# Altium PCB Rev(5).PCBDOC (part 2 of 3)
Units mm, origin at the board's own origin, x right, y up, seen from the top; angles counter-clockwise.
Board outline 161.79 x 99.5 mm, 4 copper layers (Top Layer, InternalPlane1, InternalPlane2, Bottom Layer); 374 components, 275 nets, 1404 pads, 444 vias.
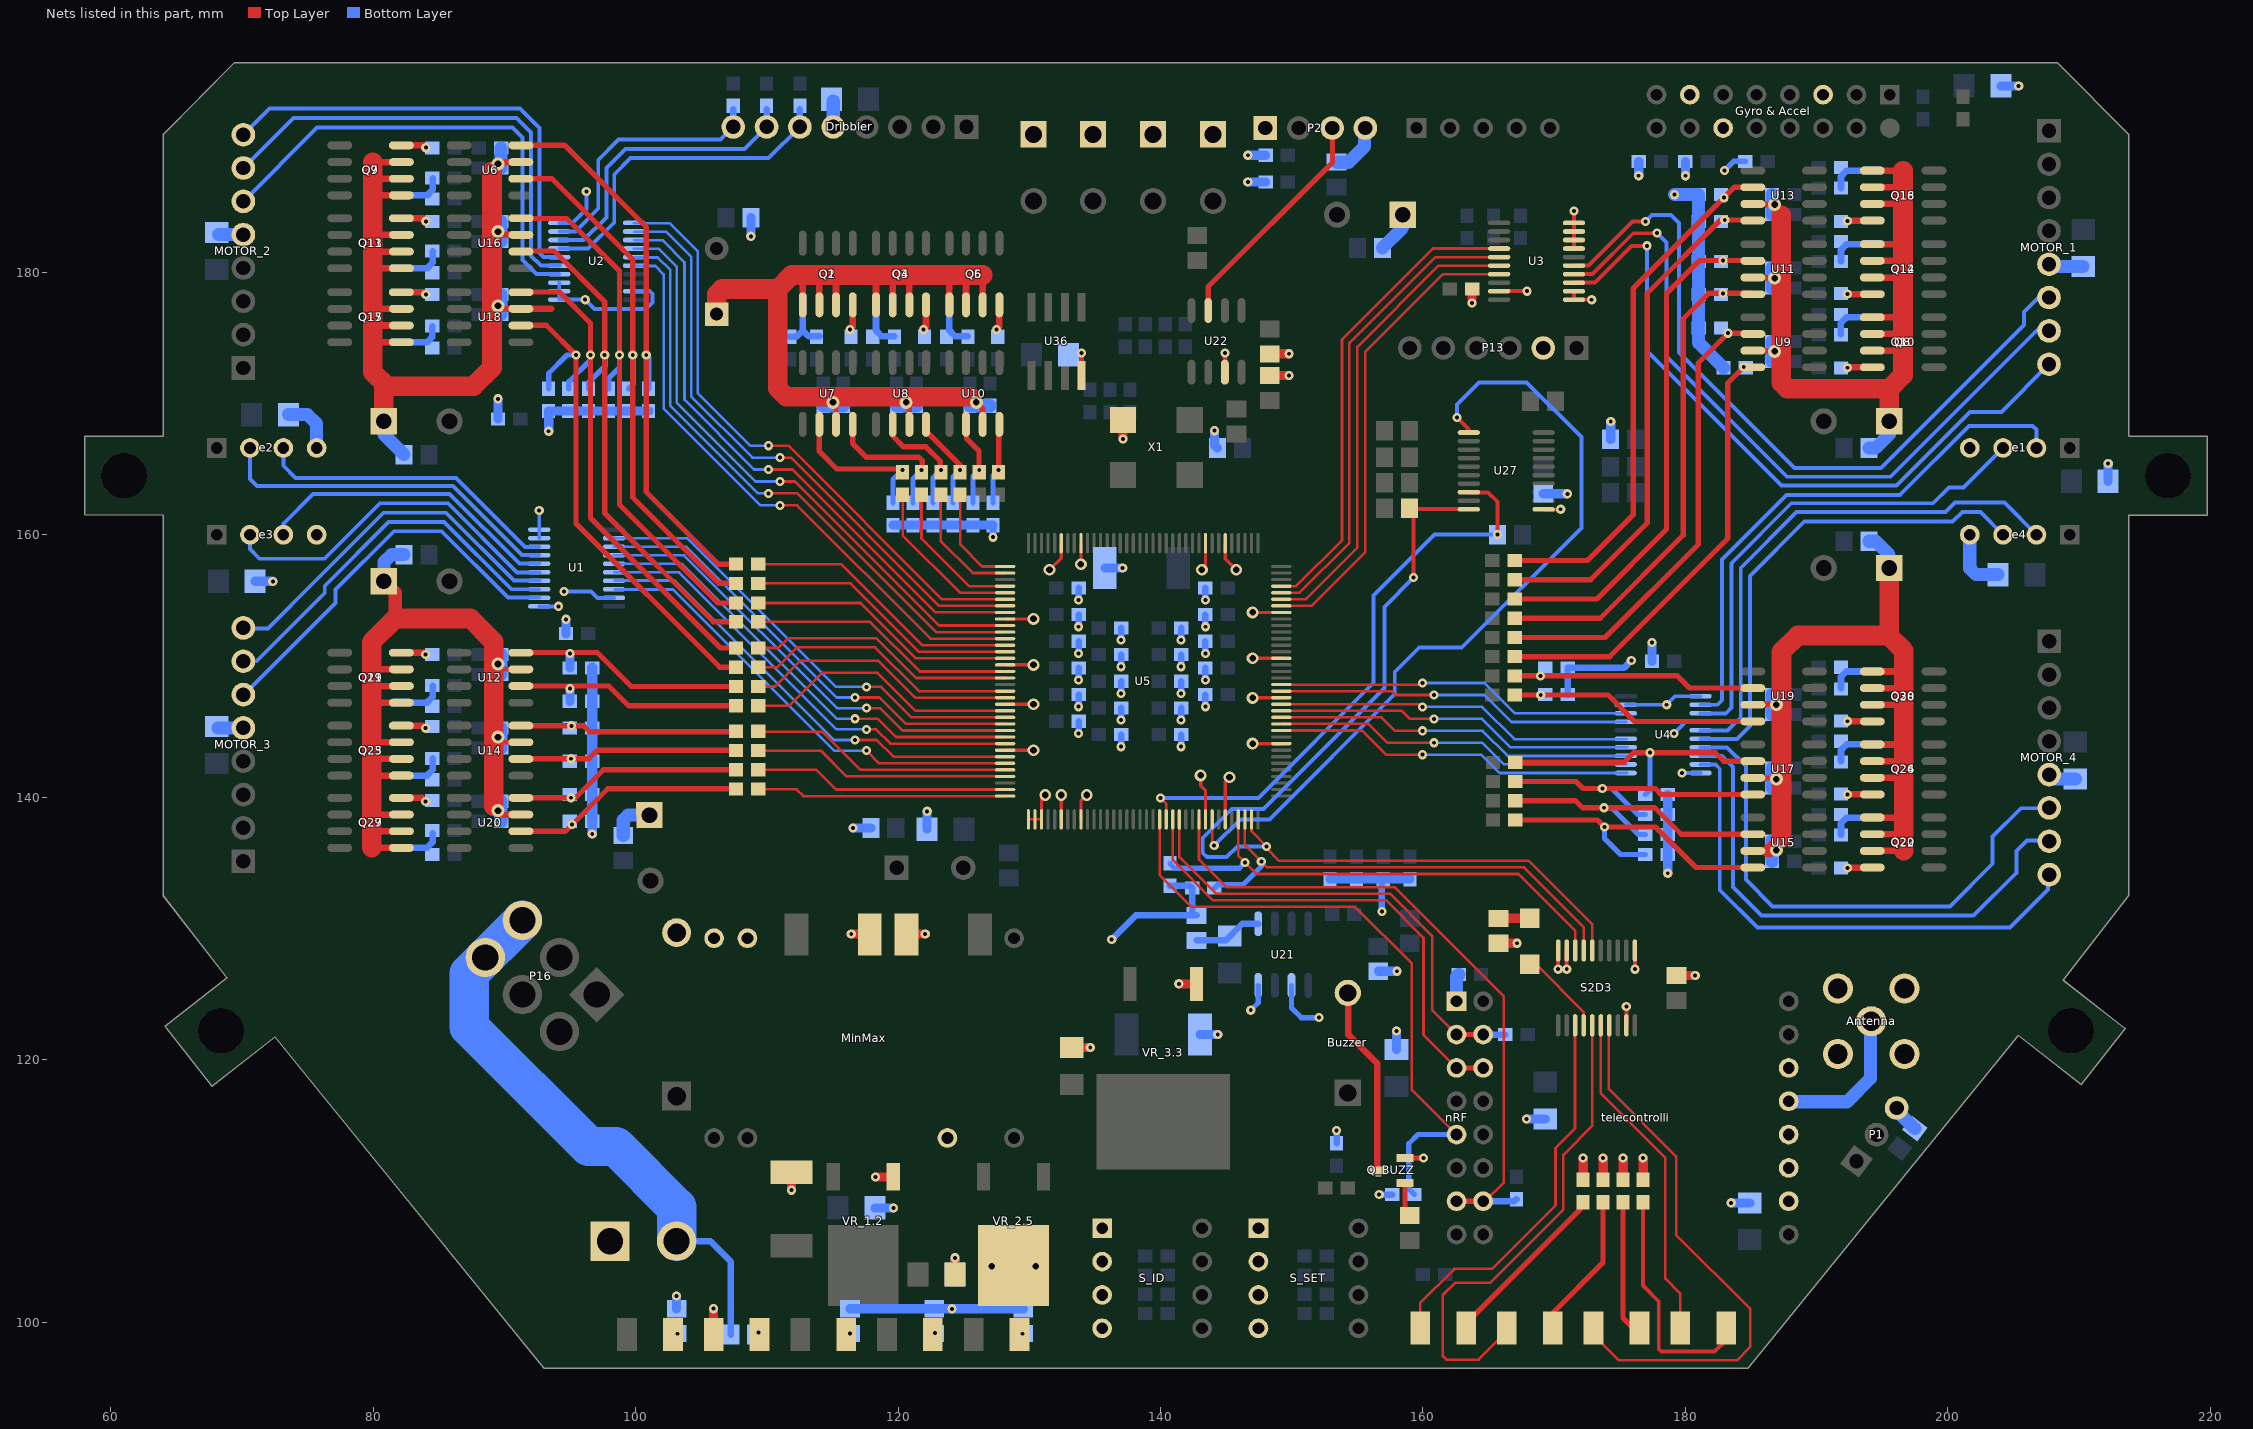
[diagram p4: the nets of this part, all layers, seen from the top]

## Via types
v1: diameter 0.7, hole 0.3, Top Layer to Bottom Layer, 308 vias
v2: diameter 1, hole 0.5, Top Layer to Bottom Layer, 66 vias
v3: diameter 0.9, hole 0.5, Top Layer to Bottom Layer, 38 vias
v4: diameter 0.99, hole 0.5, Top Layer to Bottom Layer, 30 vias
v5: diameter 0.6, hole 0.3, Top Layer to Bottom Layer, 2 vias

## Nets (pads, with @x,y where several pads share a name; then routed paths per layer and width w, separated by ;. In a path a pad name is that pad's centre, name@x,y a point inside that pad or via, vN(x,y) a via of type N, cw(c..) or ccw(c..) an arc to the next point about the centre after c; other vN are vias at no path point) (continued)
D_IO12: nRF.5 R157.1 U5.57 | length 48.7
  Top Layer w0.2: U5.57@139.934,138.319 139.934,134.096 142.37,131.66 154.82,131.66 159.16,127.32 159.16,117.7 nRF.5@162.56,114.3
  Bottom Layer w0.4: R157.1@159.346,109.728 158.92,110.154 158.92,113.6 159.62,114.3 nRF.5@162.56,114.3
D_IO13: nRF.3 telecontrolli.14 U5.59 | length 37.7
  Top Layer w0.2: U5.59@140.934,138.319 140.934,135.206 143.98,132.16 157.17,132.16 160.04,129.29 160.04,121.9 nRF.3@162.56,119.38
  Top Layer w0.4: nRF.3@162.56,119.38 telecontrolli.14@164.592,119.38
D_IO14: nRF.2 R127.2 telecontrolli.15 U5.60 | length 36.6
  Top Layer w0.2: U5.60@141.434,138.319 141.434,135.446 144.22,132.66 157.49,132.66 160.7,129.45 160.7,123.78 nRF.2@162.56,121.92
  Top Layer w0.4: nRF.2@162.56,121.92 telecontrolli.15@164.592,121.92
  Bottom Layer w0.5: telecontrolli.15@164.592,121.92 R127.2@166.282,121.92
D_IO15: nRF.7 R128.2 telecontrolli.10 U5.63 | length 51.6
  Top Layer w0.2: U5.63@142.934,138.319 142.934,135.256 145.03,133.16 157.85,133.16 166.17,124.84 166.17,110.66 164.661,109.151 telecontrolli.10@164.63,109.12
  Top Layer w0.4: nRF.7@162.56,109.22 telecontrolli.10@164.592,109.22
  Bottom Layer w0.5: telecontrolli.10@164.592,109.22 166.966,109.22 R128.2@167.132,109.386
D_IO17: R126.1 S2D3.8 U5.69 | length 38.4
  Top Layer w0.2: U5.69@145.934,138.319 145.934,135.536 v1(146.437,135.033) 147.31,134.16 167.28,134.16 171.61,129.83 171.61,128.35 171.619,128.341 S2D3.8@171.64,128.32
  Bottom Layer w0.4: R126.1@140.716,134.962 141.078,134.6 146.003,134.6 v1(146.437,135.033)
D_IO18: R125.1 S2D3.7 U5.70 | length 36.8
  Top Layer w0.2: U5.70@146.434,138.319 146.434,136.356 v1(147.683,135.107) 148.13,134.66 167.7,134.66 172.25,130.11 S2D3.7@172.25,128.34
  Bottom Layer w0.4: R125.1@144.106,133.096 144.35,133.34 146.29,133.34 147.683,134.733 v1(147.683,135.107)
DEBUG_D_1: D_D_1.1 S2D3.13 | length 30.2
  Top Layer w0.2: D_D_1.1@159.794,99.06 159.794,101.474 162.39,104.07 165.26,104.07 170.1,108.91 170.1,113.27 171.59,114.76 S2D3.13@171.59,122.69
DEBUG_D_2: D_D_2.1 S2D3.15 | length 37.1
  Top Layer w0.2: D_D_2.1@166.18,99.09 164.23,97.14 161.8,97.14 161.51,97.43 161.51,102.06 162.45,103 165.12,103 170.7,108.58 170.7,112.76 172.9,114.96 S2D3.15@172.9,122.626
DEBUG_D_3: D_D_3.1 S2D3.17 | length 42.2
  Top Layer w0.2: D_D_3.1@173.01,99.04 174.95,97.1 183.92,97.1 184.95,98.13 184.95,101.01 179.3,106.66 179.3,112.635 174.17,117.765 S2D3.17@174.17,122.67
DEBUG_D_4: D_D_4.1 S2D3.16 | length 25.6
  Top Layer w0.2: S2D3.16@173.54,122.59 173.54,117.455 178.48,112.515 178.48,103.32 179.606,102.194 D_D_4.1@179.606,99.56 ; D_D_4.1@179.55,99.05 D_D_4.1@179.55,99.072
DIN: U5.65 U27.1 | length 62.4
  Top Layer w0.2: U5.65@143.934,138.319 143.934,136.496 v1(144.09,136.34)
  Top Layer w0.3: v1@162.61,168.94 163.47,168.08 U27.1@163.47,167.79
  Bottom Layer w0.3: v1@144.09,136.32 146.09,138.32 148.3,138.32 157.85,147.87 157.85,149.56 159.72,151.43 162.96,151.43 172.07,160.54 172.07,167.45 167.9,171.62 164.28,171.62 162.59,169.93 v1@162.59,168.92
  other v1: 162.59,168.94
DONE: R34.2 S2D3.6 U5.71 U27.10 | length 76.1
  Top Layer w0.2: U5.71@146.934,138.319 146.934,137.416 v1(148.09,136.26) ; v1@148.075,136.245 v1@148.08,136.24 ; v1@148.1,136.26 148.1,136.1 149.04,135.16 168.07,135.16 172.9,130.33 S2D3.6@172.9,128.32
  Top Layer w0.3: v1@159.29,156.74 159.29,161.632 158.962,161.96 U27.10@163.46,161.96
  Bottom Layer w0.3: v1(148.09,136.26) 145.86,136.26 145.04,135.44 143.55,135.44 143.22,135.77 143.22,136.9 145.43,139.11 147.85,139.11 157.07,148.33 157.07,154.52 v1@159.29,156.74
  other v1: 159.27,156.76
DONE_LED: D_Done.1 S2D3.14 | length 7.1
  Top Layer w0.2: D_Done.1@167.64,127.282 168.598,127.282 172.253,123.627 S2D3.14@172.253,122.626
"ENCODER 1-0": U4.17 U5.89 | length 27.3
  Top Layer w0.2: U5.89@149.209,148.094 157.61,148.094 157.904,147.8 v1(160.85,147.8)
  Bottom Layer w0.2: v1(160.85,147.8) 164.69,147.8 166.75,145.74 U4.17@175.5,145.74
"ENCODER 1-1": U4.18 U5.90 | length 27.3
  Top Layer w0.2: U5.90@149.209,148.594 159.854,148.594 v1(159.97,148.71)
  Bottom Layer w0.2: v1(159.97,148.71) 164.7,148.71 167.01,146.4 U4.18@175.47,146.4
"ENCODER 2-0": U1.12 U5.24 | length 35.5
  Top Layer w0.2: v1(117.6,148.42) 118.71,148.42 121.036,146.094 U5.24@128.159,146.094
  Bottom Layer w0.2: U1.12@98.36,159.8 98.379,159.78 98.41,159.75 103.93,159.75 115.26,148.42 v1(117.6,148.42)
"ENCODER 2-1": U1.13 U5.25 | length 35.4
  Top Layer w0.2: v1(116.72,147.61) 118.58,147.61 120.596,145.594 U5.25@128.159,145.594
  Bottom Layer w0.2: U1.13@98.34,159.11 103.82,159.11 115.32,147.61 v1(116.72,147.61)
"ENCODER 3-0": U1.14 U5.26 | length 35.3
  Top Layer w0.2: v1(117.6,146.8) 118.64,146.8 120.346,145.094 U5.26@128.159,145.094
  Bottom Layer w0.2: U1.14@98.34,158.44 103.7,158.44 115.34,146.8 v1(117.6,146.8)
"ENCODER 3-1": U1.15 U5.27 | length 35.3
  Top Layer w0.2: v1(116.72,145.99) 118.45,145.99 119.846,144.594 U5.27@128.159,144.594
  Bottom Layer w0.2: U1.15@98.34,157.79 103.52,157.79 115.32,145.99 v1(116.72,145.99)
"ENCODER 4-0": U4.14 U5.86 | length 27.5
  Top Layer w0.2: U5.86@149.209,146.594 158.396,146.594 159.01,145.98 v1(160.85,145.98)
  Bottom Layer w0.2: v1(160.85,145.98) 164.52,145.98 166.69,143.81 U4.14@175.55,143.81
"ENCODER 4-1": U4.15 U5.87 | length 27.4
  Top Layer w0.2: U5.87@149.209,147.094 159.766,147.094 v1(159.97,146.89)
  Bottom Layer w0.2: v1(159.97,146.89) 164.52,146.89 166.97,144.44 U4.15@175.52,144.44
GND: "Gyro & Accel.5" "Gyro & Accel.12" "Gyro & Accel.13" Antenna.1 Antenna.2 Antenna.4 Antenna.5 Battery.1 C1.2 C2(tele).2 C2.2 C3.2 C4.1 C5.2 C6.2 C7.2 C8.2 C9.2 C10.2 C11.1 C12.1 C13.1 C14.1 C15.1 C16.1 C17.1 C18.1 C19.1 C20.2 C21.2 C22.1 C23.1 C24.1 C25.1 C26.1 C27.1 C28.1 C29.1 C30.1 C31.1 C32.1 C33.1 C34.1 C35.1 C36.1 C37.1 C38.1 C39.1 C40.1 C41.1 C42.1 C43.1 C44.1 C45.1 C46.1 C47.1 C48.1 C49.1 C50.1 C51.1 C52.1 C53.1 C54.1 C55.1 C56.1 C57.1 C58.1 C59.1 C60.1 C61.1 C62.1 C63.2 C64.1 C65.2 C66.2 C67.2 C68.2 C69.2 C70.2 C71.2 C72.2 C73.1 C74.1 C75.1 C76.1 C77.1 C78.1 C79.1 C80.2 C81.2 C110.2 C120.2 C130.2 C(tele).2 C_1.2 C_16.2 C_17.2 C_19.2 C_ADC.1 C_DRIBBLER.1 C_IR.2 C_M1.1 C_M2.1 C_M3.1 C_M4.1 C_MIKONA.1 CnRF.1 D_correction.1 D_REV.1 Dribbler.5 e1.4 e2.4 e3.4 e4.4 MinMax.4 MinMax.6 MinMax.17 MOTOR_1.5 MOTOR_2.5 MOTOR_3.5 MOTOR_4.5 nRF.1 P1.3 P2.1 P13.2 Q2.1 Q2.2 Q2.3 Q4.1 Q4.2 Q4.3 Q6.1 Q6.2 Q6.3 Q9.1 Q9.2 Q9.3 Q10.1 Q10.2 Q10.3 Q13.1 Q13.2 Q13.3 Q14.1 Q14.2 Q14.3 Q17.1 Q17.2 Q17.3 Q18.1 Q18.2 Q18.3 Q21.1 Q21.2 Q21.3 Q22.1 Q22.2 Q22.3 Q25.1 Q25.2 Q25.3 Q26.1 Q26.2 Q26.3 Q29.1 Q29.2 Q29.3 Q30.1 Q30.2 Q30.3 Q_BUZZ.2 R1.2 R2.5.1 R3.1 R21.1 R22.2 R24.1 R45.1 R53.2 R54.2 R56.2 R57.2 R58.2 R63.2 R64.2 R69.2 R70.2 R75.2 R76.2 R81.2 R82.2 R87.2 R88.2 R93.1 R94.2 R95.2 R96.2 R97.2 R98.2 R99.2 R100.2 R101.2 R102.2 R103.2 R104.2 R105.2 R106.2 R107.2 R108.2 R114.2 R120.2 R121.2 R122.1 R123.2 R124.2 R125.2 R126.2 R134.2 R154.2 R155.2 R156.2 R157.2 R159.2 R160.1 R174.2 R346.1 R_done_led.2 RST_CAP_1.1 S2D3.1 S2D3.9 S2D3.10 S2D3.19 S_D_1.1 S_D_2.1 S_D_3.1 S_D_4.1 S_ID.1 S_ID.2 S_ID.3 S_ID.4 S_SET.1 S_SET.2 S_SET.3 S_SET.4 telecontrolli.2 telecontrolli.3 telecontrolli.4 telecontrolli.6 U1.1 U1.9 U1.10 U1.19 U2.1 U2.2 U2.3 U2.10 U2.19 U3.1 U3.2 U3.7 U3.8 U3.9 U3.10 U3.19 U4.1 U4.4 U4.10 U4.19 U5.9 U5.16 U5.22 U5.29 U5.37 U5.38 U5.39 U5.42 U5.45 U5.64 U5.67 U5.81 U5.88 U5.94 U5.101 U5.114 U5.117 U5.136 U5.139 U6.3 U7.3 U8.3 U9.3 U10.3 U11.3 U12.3 U13.3 U14.3 U15.3 U16.3 U17.3 U18.3 U19.3 U20.3 U21.2 U21.4 U22.3 U27.11 U36.4 VR_1.2.1 VR_2.5.4 VR_3.3.1 X1.2 | length 687.6
  Top Layer w0.2: 80.812,171.112 81.04,171.34 ; U5.37@129.934,138.319 U5.39@130.929,138.319
  Top Layer w0.25: U5.29@128.159,143.594 v3(130.32,143.594) ; U5.22@128.159,147.094 v3(130.32,147.094) ; U5.16@128.159,150.094 v3(130.32,150.094) ; U5.9@128.159,153.594 v3(130.32,153.594) ; U5.39@130.93,138.32 v3@130.93,140.18 ; v3(131.54,157.34) 132.434,158.234 U5.139@132.434,159.369 ; U5.42@132.434,138.319 v3(132.434,140.18) ; U5.45@133.934,138.319 133.934,139.734 v3(134.38,140.18) ; v3(133.934,157.76) U5.136@133.934,159.369 ; v3(143.06,141.67) 143.06,140.87 143.434,140.496 U5.64@143.434,138.319 ; v3(143.16,157.34) 143.434,157.614 U5.117@143.434,159.369 ; U5.67@144.934,138.319 144.934,141.204 v3(145.26,141.53) ; U5.114@144.934,159.369 144.934,158.186 v3(145.78,157.34) ; v3(147.02,144.094) U5.81@149.209,144.094 ; v3@147.02,147.594 U5.88@149.209,147.594 ; v3@147.02,150.594 U5.94@149.209,150.594 ; v3(147.02,154.094) U5.101@149.209,154.094
  Top Layer w0.3: U3.19@165.806,178.573 v1(167.919,178.573) ; U27.11@169.198,161.951 v1@170.494,161.951 ; v1@170.303,126.91 S2D3.10@170.303,128.326 ; v1@170.953,126.91 S2D3.9@170.953,128.326 ; U3.2@171.506,178.573 U3.1@171.506,177.923 v1@172.856,177.923 ; U3.7@171.506,181.823 v1(171.506,184.689) ; S2D3.19@175.503,122.626 v1@175.503,124.042 ; v1@176.153,126.91 S2D3.1@176.153,128.326
  Top Layer w0.35: v4@89.331,149.751 U12.3@91.256,149.751 ; v4@89.335,144.195 U14.3@91.256,144.195 ; U19.3@185.32,147.08 U19.3@185.33,147.09
  Top Layer w0.4: U7.3@115.263,168.384 v4@115.263,170.098 ; U8.3@120.86,168.38 v4@120.86,170.12 ; v4(125.972,170.098) 126.45,169.62 U10.3@126.45,168.38 ; U36.4@133.985,172.152 v1@133.985,173.858 ; U22.3@144.907,172.402 v1@144.907,173.86 ; Q_BUZZ.2@158.627,112.513 v1@160.043,112.513 ; U9.3@185.08,174.01 v4@186.7,174.01 ; U11.3@185.08,179.6 v4@186.97,179.6 ; U13.3@185.084,185.197 186.483,185.197 187.31,184.37 ; U17.3@185.32,141.48 v4@186.89,141.48 ; U15.3@185.33,135.91 186.35,135.91 ; U19.3@185.33,147.09 v4@186.47,147.09
  Top Layer w0.5: 79.88,136.145 Q29.1@82.15,136.145 ; 79.88,137.415 Q29.2@82.15,137.415 ; 79.88,138.685 Q29.3@82.15,138.685 ; 79.88,141.655 Q25.1@82.15,141.655 ; 79.88,142.925 Q25.2@82.15,142.925 ; 79.88,144.195 Q25.3@82.15,144.195 ; 79.88,147.211 Q21.1@82.15,147.211 ; 79.88,148.481 Q21.2@82.15,148.481 ; 79.88,149.751 Q21.3@82.15,149.751 ; 79.96,174.685 Q17.1@82.15,174.685 ; 79.96,175.957 Q17.2@82.15,175.955 ; 79.96,177.227 Q17.3@82.15,177.225 ; 79.96,180.321 Q13.1@82.15,180.321 ; 79.96,181.593 Q13.2@82.15,181.591 ; 79.96,182.863 Q13.3@82.15,182.861 ; 79.96,185.871 Q9.1@82.15,185.873 ; 79.96,187.143 Q9.2@82.15,187.143 ; 79.96,188.413 Q9.3@82.15,188.413 ; 89.06,187.7 89.773,188.413 U6.3@91.256,188.413 ; v4@89.19,139.31 89.815,138.685 U20.3@91.256,138.685 ; v4@89.411,182.861 U16.3@91.256,182.861 ; v4@89.425,177.225 93.571,177.225 ; Q2.1@112.731,177.531 112.731,179.8 ; Q2.2@114.001,177.531 114.001,179.8 ; Q2.3@115.271,177.531 115.271,179.8 ; Q4.1@118.319,177.531 118.319,179.8 ; Q4.2@119.589,177.531 119.589,179.8 ; Q4.3@120.859,177.531 120.859,179.8 ; Q6.1@123.907,177.531 123.907,179.8 ; Q6.2@125.177,177.531 125.177,179.8 ; Q6.3@126.447,177.531 126.447,179.8 ; Q22.3@194.246,135.917 196.65,135.917 ; Q22.2@194.246,137.187 196.65,137.187 ; Q22.1@194.246,138.457 196.65,138.457 ; Q26.3@194.246,141.487 196.65,141.487 ; Q26.2@194.246,142.757 196.65,142.757 ; Q26.1@194.246,144.027 196.65,144.027 ; Q30.3@194.246,147.051 196.65,147.051 ; Q30.2@194.246,148.321 196.65,148.321 ; Q30.1@194.246,149.591 196.65,149.591 ; Q10.3@194.246,174.043 196.58,174.043 ; Q10.2@194.246,175.313 196.58,175.313 ; Q10.1@194.246,176.583 196.58,176.583 ; Q14.3@194.246,179.613 196.58,179.613 ; Q14.2@194.246,180.883 196.58,180.883 ; Q14.1@194.246,182.153 196.58,182.153 ; Q18.3@194.246,185.221 196.58,185.221 ; Q18.2@194.246,186.491 196.58,186.491 ; Q18.1@194.246,187.761 196.58,187.761
  Top Layer w0.7: D_REV.1@105.94,99.35 v1(105.94,101.03) ; v1@111.89,110.064 C_19.2@111.89,111.414 ; v1(116.434,129.58) C_16.2@117.856,129.58 ; v1@118.283,111.071 VR_1.2.1@119.633,111.071 ; C_17.2@120.644,129.58 v1(122.066,129.58) ; C31.1@124.336,103.632 v1@124.336,104.906 ; C8.2@133.222,120.93 v1(134.644,120.93) ; v1@137.14,167.306 X1.2@137.14,168.764 ; v1@141.398,125.784 VR_3.3.1@142.748,125.784 ; R22.2@148.336,172.146 v1@149.794,172.146 ; C_IR.2@148.336,173.802 v1@149.794,173.802 ; v1@163.748,177.67 C76.1@163.748,178.734 ; R_done_led.2@165.758,128.878 v1(167.18,128.878) ; R114.2@172.212,111.086 v1@172.212,112.502 ; R134.2@173.736,111.086 v1@173.736,112.502 ; R154.2@175.26,111.086 v1@175.26,112.502 ; R174.2@176.784,111.086 v1@176.784,112.502 ; C63.2@179.324,126.426 v1(180.746,126.426)
  Top Layer w1: C_M3.1@80.812,156.464 81.68,155.596 81.68,153.63 ; VR_2.5.4@128.786,104.303 VR_2.5.4@128.81,104.28 ; 186.35,135.91 187.33,136.89
  Top Layer w1.5: 79.88,136.151 79.88,151.83 81.68,153.63 87.41,153.63 89.19,151.85 v4@89.19,139.31 ; 79.96,188.401 79.96,172.42 81.04,171.34 87.66,171.34 89.06,172.74 89.06,187.7 ; C_M2.1@80.812,168.656 80.812,171.504 ; C_DRIBBLER.1@106.172,176.824 106.172,178.332 106.58,178.74 110.84,178.74 ; 125.53,170.54 111.47,170.54 110.84,171.17 110.84,178.74 ; 126.451,179.8 111.9,179.8 110.84,178.74 ; 187.31,184.37 187.31,171.61 187.78,171.14 195.55,171.14 196.58,172.17 196.58,187.761 ; 187.33,136.89 187.33,151.1 188.57,152.34 195.48,152.34 196.65,151.17 196.65,135.921 ; 195.54,152.4 C_M4.1@195.54,157.48 ; C_M1.1@195.54,168.656 195.54,171.13
  Bottom Layer w0.3: U1.1@92.654,154.555 v1@94.112,154.555 ; U1.9@92.654,159.755 v1@92.654,161.863 ; U2.3@94.178,179.223 U2.1@94.178,177.923 v1(96.157,177.923) 96.87,177.21 100.81,177.21 101.3,177.7 101.3,178.35 101.077,178.573 U2.19@99.878,178.573 ; U2.10@94.178,183.773 95.173,183.773 96.24,184.84 v1(96.24,186.18) ; v1(94.55,155.69) 96.61,155.69 97.095,155.205 U1.19@98.354,155.205 ; U4.19@175.458,147.055 v1(178.575,147.055) 179.225,147.705 U4.1@181.158,147.705 ; v1(179.13,144.86) 180.025,145.755 U4.4@181.158,145.755 ; v1@179.742,141.855 U4.10@181.158,141.855
  Bottom Layer w0.4: v1(146.88,123.778) 147.447,124.345 U21.4@147.447,125.666 ; U21.2@149.987,125.666 149.987,123.953 150.73,123.21 v1(152.08,123.21) ; v1(182.97,187.77) 183.668,188.468 R155.2@184.57,188.468
  Bottom Layer w0.5: v1(127.236,159.826) R108.2@127.236,160.748 ; v1(133.756,144.874) C23.1@133.756,145.796 ; v1(133.756,146.906) C78.1@133.756,147.828 ; v1(133.756,148.938) C17.1@133.756,149.86 ; v1(133.756,150.97) C77.1@133.756,151.892 ; v1(133.756,153.002) C18.1@133.756,153.924 ; v1(133.756,155.034) C25.1@133.756,155.956 ; v1(136.28,129.17) 138.108,130.998 C_ADC.1@142.748,130.998 ; v1(136.994,143.858) C35.1@136.994,144.78 ; v1(136.994,145.89) C34.1@136.994,146.812 ; v1(136.994,147.922) C75.1@136.994,148.844 ; v1(136.994,149.954) C36.1@136.994,150.876 ; v1(136.994,151.986) C33.1@136.994,152.908 ; R126.2@140.716,133.262 142.24,133.262 R125.2@142.406,133.096 C_ADC.1@142.406,131.34 ; v1(141.566,143.858) C74.1@141.566,144.78 ; v1(141.566,145.89) C12.1@141.566,146.812 ; v1(141.566,147.922) C73.1@141.566,148.844 ; v1(141.566,149.954) C11.1@141.566,150.876 ; v1(141.566,151.986) C13.1@141.566,152.908 ; v1(143.422,146.906) C15.1@143.422,147.828 ; v1(143.422,148.938) C16.1@143.422,149.86 ; v1(143.422,150.97) C79.1@143.422,151.892 ; v1(143.422,153.002) C14.1@143.422,153.924 ; v1(143.422,155.034) C24.1@143.422,155.956 ; R156.2@153.416,113.626 v1(153.416,114.608) ; v1(156.664,109.728) R157.2@157.646,109.728 ; v1(156.87,131.29) R120.2@156.87,133.77 ; R70.2@171.03,147.828 R57.2@171.03,149.86 175.32,149.86 v1(175.88,150.42)
  Bottom Layer w0.7: C120.2@70.996,156.464 v1@72.346,156.464 ; C37.1@89.51,168.824 v1(89.51,170.37) ; v1(93.374,167.898) R54.2@93.374,169.444 R105.2@100.994,169.444 ; C39.1@94.694,152.472 v1@94.694,153.562 ; v1(96.696,137.214) R101.2@96.696,138.176 ; R1.2@103.124,101.026 v1(103.124,101.988) ; v1@108.784,182.76 C69.2@108.784,184.178 ; R24.1@116.332,101.026 R3.1@129.54,101.026 ; v1@116.572,137.668 R122.1@117.922,137.668 ; C62.1@118.24,108.712 v1@119.658,108.712 ; R58.2@119.616,160.748 R108.2@127.236,160.748 ; RST_CAP_1.1@122.216,137.58 v1@122.216,138.93 ; R2.5.1@124.336,103.552 v1@124.336,104.902 ; C80.2@135.764,157.48 v1@137.114,157.48 ; C_1.2@143.008,121.92 v1@144.358,121.92 ; v1(144.12,167.94) 144.12,166.842 C21.2@144.338,166.624 ; v1@146.658,186.898 C64.1@148.008,186.898 ; v1@146.658,188.93 R93.1@148.008,188.93 ; R124.2@152.908,133.77 R121.2@159.004,133.77 ; R45.1@156.604,126.746 v1(158.026,126.746) ; C7.2@157.988,120.78 v1(157.988,122.202) ; v1(167.894,115.496) 169.316,115.496 ; C72.2@169.164,163.134 v1@170.998,163.134 ; R346.1@174.31,167.278 v1@174.31,168.628 ; v1(176.442,187.37) R160.1@176.442,188.468 ; C38.1@177.458,150.368 v1@177.458,151.786 ; v1@178.65,134.22 R87.2@178.65,140.217 ; v1(179.998,187.37) R159.2@179.998,188.468 ; v1@183.494,109.096 184.912,109.096 ; C10.2@204.048,194.218 v1@205.398,194.218 ; C3.2@212.22,164.084 v1@212.22,165.434
  Bottom Layer w0.8: R101.2@96.696,138.176 R96.2@96.696,149.86
  Bottom Layer w1: C110.2@68.176,145.288 MOTOR_3.5@70.104,145.288 ; C130.2@68.226,182.88 MOTOR_2.5@70.104,182.88 ; C9.2@73.536,169.164 74.996,169.164 75.692,168.468 e2.4@75.692,166.624 ; C_M3.1@80.812,156.464 80.812,157.912 81.396,158.496 C81.2@82.362,158.496 ; C_M2.1@80.812,168.656 80.812,167.666 C70.2@82.362,166.116 ; C58.1@89.75,138.176 C59.1@89.75,139.7 ; C55.1@89.75,143.764 C54.1@89.75,145.288 ; C50.1@89.75,149.352 C51.1@89.75,150.876 ; C46.1@89.75,176.784 C47.1@89.75,178.308 ; C42.1@89.75,182.372 C43.1@89.75,183.896 ; C32.1@89.75,187.96 C30.1@89.75,189.484 ; C66.2@99.06,137.094 99.06,138.27 99.434,138.644 C4.1@101.048,138.644 ; C4.1@100.82,138.67 C4.1@100.82,138.72 ; C22.1@114.3,169.838 C19.1@115.824,169.838 ; Dribbler.5@115.058,191.088 C6.2@115.058,193.074 ; C26.1@119.888,169.838 C27.1@121.412,169.838 ; C28.1@125.476,169.838 C29.1@127,169.838 ; C71.2@156.906,181.864 158.456,183.414 C_MIKONA.1@158.456,184.404 ; nRF.1@162.56,124.46 162.56,126.326 CnRF.1@162.726,126.492 ; v1(179.168,185.928) R53.2@181.014,185.928 181.014,174.632 R104.2@182.906,172.74 ; C52.1@186.602,135.128 C53.1@186.602,136.652 ; C56.1@186.602,140.716 C57.1@186.602,142.24 ; C61.1@186.602,146.304 C60.1@186.602,147.828 ; C40.1@186.602,173.228 C41.1@186.602,174.752 ; C44.1@186.602,178.816 C45.1@186.602,180.34 ; C48.1@186.602,184.404 C49.1@186.602,185.928 ; C67.2@193.99,159.512 194.498,159.512 195.53,158.48 C_M4.1@195.53,157.5 ; C68.2@193.99,166.624 194.498,166.624 195.54,167.666 C_M1.1@195.54,168.656 ; P1.3@196.106,116.128 C65.2@197.486,114.749 ; e4.4@201.676,160.012 201.676,157.444 202.148,156.972 C2.2@203.832,156.972 ; MOTOR_4.5@207.732,141.732 208.056,141.408 C1.2@209.724,141.408 ; MOTOR_1.5@207.732,180.648 207.916,180.464 C5.2@210.312,180.464
  other v1: 124.114,101.022 124.34,104.906 119.662,108.708 183.49,109.1 111.886,110.06 118.279,111.075 172.206,112.508 173.73,112.508 175.254,112.508 176.778,112.508 160.049,112.519 144.362,121.916 175.497,124.048 141.394,125.788 170.309,126.904 170.959,126.904 176.159,126.904 178.656,134.214 116.568,137.672 122.22,138.934 179.736,141.849 177.462,151.79 94.698,153.566 94.114,154.557 72.35,156.46 137.118,157.476 92.652,161.865 170.496,161.953 171.002,163.13 212.224,165.438 137.142,167.304 174.314,168.632 149.796,172.148 149.796,173.804 133.983,173.86 144.905,173.862 163.75,177.668 172.86,177.919 108.78,182.756 146.654,186.902 146.654,188.934 205.402,194.214
  other v2: 127.15,104.25 130.48,104.25
  other v3: 131.22,140.18 147.02,147.58 147.02,150.6
  other v4: 186.94,135.98 89.51,138.99 186.94,141.38 89.51,144.59 186.94,147.06 89.51,150.16 115.04,170.098 120.62,170.098 186.81,173.98 89.51,177.45 186.81,179.56 89.51,183.11 186.81,185.18 89.51,188.27
H1_1: MOTOR_1.8 U3.3 | length 53.5
  Top Layer w0.3: U3.3@171.506,179.223 173.113,179.223 175.91,182.02 v1@177.12,182.02
  Bottom Layer w0.3: v1@177.08,182.1 177.08,174.03 187.33,163.78 196.1,163.78 201.7,169.38 204.084,169.38 MOTOR_1.8@207.714,173.01
  other v1: 177.07,182.03
H1_1(3.3): U3.17 U5.102 | length 35.8
  Top Layer w0.2: U5.102@149.39,154.59 151.51,154.59 155.59,158.67 155.59,173.94 161.523,179.873 U3.17@165.806,179.873
H1_2: MOTOR_1.7 U3.4 | length 55
  Top Layer w0.3: U3.4@171.506,179.873 172.913,179.873 176.03,182.99 v1@177.83,182.99
  Bottom Layer w0.3: v1@177.84,183 178.56,182.28 178.56,173.61 187.74,164.43 195.63,164.43 206.78,175.58 207.72,175.58 MOTOR_1.7@207.78,175.64
  other v1: 177.84,183.01
H1_2(3.3): U3.16 U5.103 | length 36.1
  Top Layer w0.2: U5.103@149.209,155.094 151.064,155.094 155.003,159.033 155.003,174.323 161.203,180.523 U3.16@165.806,180.523
H1_3: MOTOR_1.6 U3.5 | length 57.6
  Top Layer w0.3: U3.5@171.506,180.523 172.613,180.523 175.97,183.88 v1(176.96,183.88)
  Bottom Layer w0.3: v1(176.96,183.88) 177.46,184.38 178.92,184.38 179.53,183.77 179.53,173.9 188.32,165.11 194.92,165.11 205.8,175.99 205.8,177 206.94,178.14 MOTOR_1.6@207.78,178.14
H1_3(3.3): U3.15 U5.104 | length 36.1
  Top Layer w0.2: U5.104@149.209,155.594 150.604,155.594 154.39,159.38 154.39,174.62 160.943,181.173 U3.15@165.806,181.173
H2_1: MOTOR_2.8 U2.6 | length 35.1
  Bottom Layer w0.3: MOTOR_2.8@70.104,190.5 72.094,192.49 91.2,192.49 92.69,191 92.69,181.48 92.99,181.18 U2.6@94.13,181.18
H2_1(3.3): U2.14 U5.10 | length 46.3
  Top Layer w0.2: v1(111,164.07) 112.14,164.07 123.116,153.094 U5.10@128.159,153.094
  Bottom Layer w0.2: U2.14@99.86,181.82 101.74,181.82 103.14,180.42 103.14,170.07 109.14,164.07 v1(111,164.07)
H2_2: MOTOR_2.7 U2.5 | length 35.9
  Bottom Layer w0.3: MOTOR_2.7@70.104,187.96 73.914,191.77 90.92,191.77 92.04,190.65 92.04,181.27 92.79,180.52 U2.5@94.25,180.52
H2_2(3.3): U2.15 U5.11 | length 46.2
  Top Layer w0.2: v1(110.12,163.16) 112.33,163.16 122.896,152.594 U5.11@128.159,152.594
  Bottom Layer w0.2: U2.15@99.88,181.14 101.68,181.14 102.64,180.18 102.64,169.83 109.31,163.16 v1(110.12,163.16)
H2_3: MOTOR_2.6 U2.4 | length 36.5
  Bottom Layer w0.3: MOTOR_2.6@70.104,185.42 75.724,191.04 90.63,191.04 91.37,190.3 91.37,180.96 92.46,179.87 U2.4@94.15,179.87
H2_3(3.3): U2.16 U5.12 | length 46
  Top Layer w0.2: v1(111,162.25) 112.31,162.25 122.466,152.094 U5.12@128.159,152.094
  Bottom Layer w0.2: U2.16@99.91,180.49 101.5,180.49 102.13,179.86 102.13,169.63 109.51,162.25 v1(111,162.25)
H3_1: MOTOR_3.8 U1.4 | length 28.4
  Bottom Layer w0.3: MOTOR_3.8@70.1,152.88 71.97,152.88 75.51,156.42 80.78,161.69 85.55,161.69 90.72,156.52 U1.4@92.68,156.52
H3_1(3.3): U1.16 U5.28 | length 35.2
  Top Layer w0.2: v1(117.6,145.18) 118.32,145.18 119.406,144.094 U5.28@128.159,144.094
  Bottom Layer w0.2: U1.16@98.36,157.15 103.32,157.15 115.29,145.18 v1(117.6,145.18)
H3_2: MOTOR_3.7 U1.3 | length 29.4
  Bottom Layer w0.3: MOTOR_3.7@70.08,150.37 71.11,150.37 76.31,155.57 76.31,156.12 81.18,160.99 85.4,160.99 90.53,155.86 U1.3@92.654,155.86
H3_2(3.3): U1.17 U5.30 | length 35.3
  Top Layer w0.2: v1(116.72,144.37) 118.37,144.37 119.646,143.094 U5.30@128.159,143.094
  Bottom Layer w0.2: U1.17@98.42,156.52 102.96,156.52 115.11,144.37 v1(116.72,144.37)
H3_3: MOTOR_3.6 U1.2 | length 30.4
  Bottom Layer w0.3: MOTOR_3.6@70.126,147.806 77.14,154.82 77.14,155.85 81.57,160.28 85.21,160.28 90.27,155.22 U1.2@92.654,155.22
H3_3(3.3): U1.18 U5.31 | length 35.2
  Top Layer w0.2: v1(117.6,143.56) 118.566,142.594 U5.31@128.159,142.594
  Bottom Layer w0.2: U1.18@98.42,155.84 102.85,155.84 115.13,143.56 v1(117.6,143.56)
H4_1: MOTOR_4.6 U4.7 | length 41
  Bottom Layer w0.3: U4.7@181.158,143.805 183.185,143.805 184.61,142.38 184.61,133.73 186.65,131.69 200.17,131.69 203.42,134.94 203.42,137.01 205.58,139.17 MOTOR_4.6@207.8,139.17
H4_1(3.3): U4.13 U5.85 | length 27.6
  Top Layer w0.2: U5.85@149.209,146.094 156.856,146.094 157.88,145.07 v1(159.97,145.07)
  Bottom Layer w0.2: v1(159.97,145.07) 164.55,145.07 166.47,143.15 U4.13@175.55,143.15
H4_2: MOTOR_4.7 U4.8 | length 40.4
  Bottom Layer w0.3: U4.8@181.158,143.155 182.795,143.155 183.64,142.31 183.64,133.16 185.81,130.99 201.96,130.99 205.22,134.25 205.22,135.91 206.02,136.71 MOTOR_4.7@207.77,136.71
H4_2(3.3): U4.12 U5.84 | length 27.6
  Top Layer w0.2: U5.84@149.209,145.594 155.846,145.594 157.28,144.16 v1(160.85,144.16)
  Bottom Layer w0.2: v1(160.85,144.16) 164.51,144.16 166.16,142.51 U4.12@175.52,142.51
H4_3: MOTOR_4.8 U4.9 | length 39.4
  Bottom Layer w0.3: U4.9@181.158,142.505 182.295,142.505 182.62,142.18 182.62,132.95 185.49,130.08 204.74,130.08 207.64,132.98 MOTOR_4.8@207.64,134.16
H4_3(3.3): U4.11 U5.83 | length 27.7
  Top Layer w0.2: U5.83@149.209,145.094 155.346,145.094 157.19,143.25 v1(159.97,143.25)
  Bottom Layer w0.2: v1(159.97,143.25) 164.44,143.25 165.84,141.85 U4.11@175.58,141.85
HD_1: Dribbler.6 R40.2 U2.7 | length 25.7
  Bottom Layer w0.3: U2.7@94.18,181.82 96.38,181.82 98.37,183.81 98.37,187.48 99.6,188.71 110.14,188.71 Dribbler.6@112.518,191.088
  Bottom Layer w0.5: Dribbler.6@112.518,191.088 R40.2@112.518,192.436
HD_1(3.3): U2.13 U5.8 | length 46.2
  Top Layer w0.2: v1(110.12,164.98) 111.95,164.98 122.836,154.094 U5.8@128.159,154.094
  Bottom Layer w0.2: U2.13@99.89,182.46 102.03,182.46 103.72,180.77 103.72,170.3 109.04,164.98 v1(110.12,164.98)
HD_2: Dribbler.7 R41.2 U2.8 | length 22.9
  Bottom Layer w0.3: U2.8@94.18,182.47 96.04,182.47 97.77,184.2 97.77,187.96 99.23,189.42 108.31,189.42 Dribbler.7@109.978,191.088
  Bottom Layer w0.5: Dribbler.7@109.978,191.088 R41.2@109.978,192.454
HD_2(3.3): U2.12 U5.7 | length 46.3
  Top Layer w0.2: v1(111,165.89) 111.83,165.89 123.126,154.594 U5.7@128.159,154.594
  Bottom Layer w0.2: U2.12@99.91,183.11 102.32,183.11 104.23,181.2 104.23,170.55 108.89,165.89 v1(111,165.89)
HD_3: Dribbler.8 R42.2 U2.9 | length 20
  Bottom Layer w0.3: U2.9@94.22,183.12 95.41,183.12 97.15,184.86 97.15,188.56 98.71,190.12 106.47,190.12 Dribbler.8@107.438,191.088
  Bottom Layer w0.5: Dribbler.8@107.438,191.088 R42.2@107.438,192.448
HD_3(3.3): U2.11 U5.6 | length 46.5
  Top Layer w0.2: v1(110.12,166.8) 111.64,166.8 123.346,155.094 U5.6@128.159,155.094
  Bottom Layer w0.2: U2.11@99.88,183.76 102.6,183.76 104.73,181.63 104.73,170.8 108.73,166.8 v1(110.12,166.8)
INIT_B: R32.2 U5.58 U27.8 | length 44.7
  Top Layer w0.2: v1(139.99,139.96) 140.434,139.516 U5.58@140.434,138.319
  Top Layer w0.3: U27.8@163.5,163.24 164.96,163.24 165.674,162.526 v1(165.674,160.02)
  Bottom Layer w0.3: v1(139.99,139.96) 147.47,139.96 156.24,148.73 156.24,155.39 160.87,160.02 v1(165.674,160.02)
KICKER_READY(3.3): U3.14 U5.105 | length 36
  Top Layer w0.2: U5.105@149.386,156.094 150.344,156.094 153.83,159.58 153.83,174.89 160.763,181.823 U3.14@165.806,181.823
L_IO1: R30.1 U5.1 | length 8.1
  Top Layer w0.2: R30.1@124.74,163.25 124.74,159.25 126.396,157.594 U5.1@128.159,157.594
L_IO2: R36.1 U5.2 | length 9.5
  Top Layer w0.2: R36.1@123.25,163.08 123.25,159.55 125.706,157.094 U5.2@128.159,157.094
L_IO3: R38.1 U5.4 | length 11.3
  Top Layer w0.2: R38.1@121.79,163.12 121.79,159.72 125.416,156.094 U5.4@128.159,156.094
L_IO4: R39.1 U5.5 | length 12.9
  Top Layer w0.2: R39.1@120.35,163.22 120.35,159.97 124.72,155.6 U5.5@128.17,155.6
L_IO11: R2.2 U5.13 | length 21.4
  Top Layer w0.2: R2.2@109.35,157.772 115.658,157.772 121.836,151.594 U5.13@128.159,151.594
L_IO12: R5.2 U5.14 | length 21
  Top Layer w0.2: R5.2@109.35,156.308 116.372,156.308 121.586,151.094 U5.14@128.159,151.094
L_IO13: R7.2 U5.15 | length 20.6
  Top Layer w0.2: R7.2@109.35,154.814 117.156,154.814 121.376,150.594 U5.15@128.159,150.594
L_IO14: R9.2 U5.17 | length 20.4
  Top Layer w0.2: R9.2@109.35,153.38 117.87,153.38 121.656,149.594 U5.17@128.159,149.594
L_IO15: R4.2 U5.18 | length 20.4
  Top Layer w0.2: R4.2@109.35,151.376 110.866,151.376 111.61,152.12 118.35,152.12 121.376,149.094 U5.18@128.159,149.094
L_IO16: R6.2 U5.20 | length 20.8
  Top Layer w0.2: R6.2@109.35,149.912 110.762,149.912 112.28,151.43 118.25,151.43 121.586,148.094 U5.20@128.159,148.094
L_IO17: R8.2 U5.21 | length 20.8
  Top Layer w0.2: R8.2@109.35,148.448 110.608,148.448 112.57,150.41 118.48,150.41 121.296,147.594 U5.21@128.159,147.594
L_IO18: R10.2 U5.23 | length 21
  Top Layer w0.2: R10.2@109.35,146.984 111.714,146.984 114.21,149.48 118.44,149.48 121.326,146.594 U5.23@128.159,146.594
L_IO26: R11.2 U5.32 | length 20
  Top Layer w0.2: R11.2@109.4,145 114.22,145 117.126,142.094 U5.32@128.159,142.094
L_IO27: R13.2 U5.33 | length 19.5
  Top Layer w0.2: R13.2@109.42,143.55 114.12,143.55 116.076,141.594 U5.33@128.159,141.594
L_IO28: R15.2 U5.35 | length 19.5
  Top Layer w0.2: R15.2@109.31,142.11 113.76,142.11 115.276,140.594 U5.35@128.159,140.594
L_IO29: R17.2 U5.36 | length 19.1
  Top Layer w0.2: R17.2@109.29,140.61 112.27,140.61 112.787,140.093 U5.36@128.159,140.094
M1_1: R12.2 R53.1 U13.2 | length 40
  Top Layer w0.4: R12.2@166.998,158.044 172.544,158.044 176.02,161.52 176.02,178.78 183.74,186.5 U13.2@185.13,186.5
  other v1: 182.938,185.698
M1_2: R14.2 R63.1 U13.4 | length 39.8
  Top Layer w0.4: R14.2@166.998,156.58 172.78,156.58 177.1,160.9 177.1,178.42 182.67,183.99 U13.4@185.19,183.99
  other v1: 183,183.99
M1_3: R16.2 R76.1 U11.2 | length 39.4
  Top Layer w0.4: R16.2@166.998,155.116 173.256,155.116 178.57,160.43 178.57,178.4 181.09,180.92 U11.2@185.2,180.92
  other v1: 182.87,180.92
M1_4: R18.2 R94.1 U11.4 | length 38
  Top Layer w0.4: R18.2@166.998,153.652 173.512,153.652 179.84,159.98 179.84,176.47 181.78,178.41 U11.4@185.11,178.41
  other v1: 182.87,178.41
M1_5: R19.2 R99.1 U9.2 | length 35.9
  Top Layer w0.4: R19.2@166.998,152.186 173.886,152.186 180.98,159.28 180.98,173.1 v1(183.25,175.37) U9.2@185.2,175.37
M1_6: R23.2 R104.1 U9.4 | length 34.3
  Top Layer w0.4: R23.2@166.998,150.722 174.232,150.722 183.23,159.72 183.23,171.57 v1(184.45,172.79) U9.4@185.26,172.79
M2_1: R6.1 R54.1 U18.2 | length 38.6
  Top Layer w0.4: U18.2@91.23,175.98 93.19,175.98 v1(95.46,173.71) 95.46,160.87 106.418,149.912 R6.1@107.65,149.912
  Bottom Layer w0.4: R54.1@93.374,171.144 93.374,172.314 94.77,173.71 v1(95.46,173.71)
M2_2: R4.1 R64.1 U18.4 | length 39.7
  Top Layer w0.4: U18.4@91.19,178.51 94.19,178.51 96.57,176.13 96.57,161.28 106.474,151.376 R4.1@107.65,151.376
  Bottom Layer w0.4: R64.1@94.898,171.144 94.898,171.668 96.57,173.34 v1(96.57,173.71)
M2_3: R9.1 R81.1 U16.2 | length 40.5
  Top Layer w0.4: U16.2@91.33,181.63 93.8,181.63 97.64,177.79 97.64,161.66 105.92,153.38 R9.1@107.65,153.38
  Bottom Layer w0.4: R81.1@96.422,171.144 96.422,171.622 97.64,172.84 v1(97.64,173.71)
M2_4: R7.1 R95.1 U16.4 | length 41.9
  Top Layer w0.4: U16.4@91.23,184.12 94.75,184.12 98.77,180.1 98.77,162.3 106.256,154.814 R7.1@107.65,154.814
  Bottom Layer w0.4: R95.1@97.946,171.144 97.946,171.926 98.77,172.75 v1(98.77,173.71)
M2_5: R5.1 R100.1 U6.2 | length 42.5
  Top Layer w0.4: U6.2@91.256,187.143 93.617,187.143 99.78,180.98 99.78,162.86 106.332,156.308 R5.1@107.65,156.308
  Bottom Layer w0.4: R100.1@99.47,171.144 99.78,171.454 v1(99.78,173.71)
M2_6: R2.1 R105.1 U6.4 | length 44.1
  Top Layer w0.4: U6.4@91.256,189.7 94.57,189.7 100.81,183.46 100.81,163.26 106.298,157.772 R2.1@107.65,157.772
  Bottom Layer w0.4: v1(100.81,173.71) 100.994,173.526 R105.1@100.994,171.144
M3_1: R13.1 R56.1 U14.2 | length 16.8
  Top Layer w0.4: U14.2@91.21,142.87 91.261,142.921 91.28,142.94 96.42,142.94 97.06,143.58 107.65,143.58 R13.1@107.68,143.58
  other v1: 95.09,142.94
M3_2: R11.1 R69.1 U14.4 | length 16.5
  Top Layer w0.4: U14.4@91.32,145.39 91.325,145.396 91.38,145.45 96.04,145.45 96.49,145 R11.1@107.64,145
  other v1: 95.12,145.45
M3_3: R10.1 R82.1 U12.2 | length 17.9
  Top Layer w0.4: U12.2@91.34,148.56 91.41,148.49 97.95,148.49 99.456,146.984 R10.1@107.65,146.984
  Bottom Layer w0.7: R82.1@94.996,147.32 v1(94.996,148.282)
M3_4: R8.1 R96.1 U12.4 | length 18.4
  Top Layer w0.4: U12.4@91.43,151.04 97.07,151.04 99.662,148.448 R8.1@107.65,148.448
  Bottom Layer w0.7: R96.1@94.996,149.86 v1@94.996,150.95
  other v1: 95,150.954
M3_5: R17.1 R101.1 U20.2 | length 17.7
  Top Layer w0.4: U20.2@91.23,137.42 91.256,137.42 94.65,137.42 97.88,140.65 R17.1@107.62,140.65
  other v1: 95.152,137.922
M3_6: R15.1 R106.1 U20.4 | length 17.2
  Top Layer w0.4: U20.4@91.35,139.97 95.41,139.97 97.54,142.1 107.65,142.1 R15.1@107.68,142.1
  other v1: 95.07,139.97
M4_1: R26.2 R57.1 U19.2 | length 18.5
  Top Layer w0.4: R26.2@166.998,149.258 179.392,149.258 180.325,148.325 U19.2@185.14,148.325
  other v1: 168.95,149.258
M4_2: R28.2 R70.1 U19.4 | length 19
  Top Layer w0.4: R28.2@166.998,147.794 174.126,147.794 176.135,145.785 U19.4@185.14,145.785
  other v1: 168.979,147.794
M4_3: R20.2 R87.1 U17.2 | length 22
  Top Layer w0.4: R20.2@167.038,142.668 175.308,142.668 176.04,143.4 182.28,143.4 182.923,142.757 U17.2@185.14,142.757
  Bottom Layer w0.4: R87.1@176.95,140.208 177.3,140.558 v1(177.3,143.4)
M4_4: R25.2 R97.1 U17.4 | length 22.6
  Top Layer w0.4: R25.2@167.038,141.204 171.666,141.204 172.202,140.668 177.702,140.668 178.153,140.217 U17.4@185.14,140.217
  Bottom Layer w0.4: v1(173.67,140.668) 174.392,140.668 176.376,138.684 R97.1@176.95,138.684
M4_5: R27.2 R102.1 U15.2 | length 23.1
  Top Layer w0.4: R27.2@167.038,139.74 171.63,139.74 172.166,139.204 177.666,139.204 179.683,137.187 U15.2@185.14,137.187
  Bottom Layer w0.4: v1(173.81,139.204) 174.366,139.204 176.41,137.16 R102.1@176.95,137.16
M4_6: R29.2 R107.1 U15.4 | length 24.1
  Top Layer w0.4: R29.2@167.038,138.276 173.304,138.276 173.84,137.74 177.72,137.74 180.813,134.647 U15.4@185.14,134.647
  Bottom Layer w0.4: v1(173.83,137.74) 173.83,136.86 175.054,135.636 R107.1@176.95,135.636
MD_1: R39.2 R58.1 U7.2 | length 11.9
  Top Layer w0.4: U7.2@114,168.57 114,166.36 115.33,165.03 R39.2@120.332,165.03
  Bottom Layer w0.4: R58.1@119.616,162.448 119.616,164.224 v1(120.332,164.94)
MD_2: R38.2 R75.1 U7.4 | length 10.8
  Top Layer w0.4: U7.4@116.54,168.46 116.54,166.96 117.59,165.91 121.59,165.91 121.85,165.65 R38.2@121.85,164.94
  Bottom Layer w0.4: R75.1@121.14,162.448 121.14,164.284 v1(121.796,164.94)
MD_3: R36.2 R88.1 U8.2 | length 8.7
  Top Layer w0.4: U8.2@119.6,168.38 119.6,167.53 120.42,166.71 122.13,166.71 123.22,165.62 R36.2@123.22,164.94
  Bottom Layer w0.4: R88.1@122.664,162.448 122.664,164.344 v1(123.26,164.94)
MD_4: R30.2 R98.1 U8.4 | length 7
  Top Layer w0.4: U8.4@122.13,168.53 122.13,167.92 124.73,165.32
  Bottom Layer w0.4: R98.1@124.188,162.448 124.188,164.404 v1(124.724,164.94)
MD_5: R35.2 R103.1 U10.2 | length 6.6
  Top Layer w0.4: U10.2@125.21,168.42 125.21,167.35 126.17,166.39 R35.2@126.17,164.94
  Bottom Layer w0.4: R103.1@125.712,162.448 125.712,164.464 v1(126.188,164.94)
MD_6: R37.2 R108.1 U10.4 | length 5.9
  Top Layer w0.4: R37.2@127.679,164.94 U10.4@127.679,168.169
  Bottom Layer w0.4: R108.1@127.236,162.448 127.236,164.524 v1(127.652,164.94)
NetAntenna_3: Antenna.3 telecontrolli.5 | length 11.3
  Bottom Layer w1: telecontrolli.5@187.93,116.8 192.33,116.8 194.11,118.58 Antenna.3@194.11,122.936
NetBattery_2: Battery.2 P16.5 P16.6 R_D_REV.1 | length 44.2
  Bottom Layer w0.5: Battery.2@103.124,106.172 105.698,106.172 107.254,104.616 R_D_REV.1@107.254,99.06
  Bottom Layer w3: P16.5@91.371,130.625 87.32,126.574 87.32,122.5 96.43,113.39 98.49,113.39 103.124,108.756 Battery.2@103.124,106.172
NetBuzzer_4: Buzzer.4 Q_BUZZ.3 | length 14.5
  Top Layer w0.5: Buzzer.4@154.306,125.1 154.306,121.924 156.527,119.703 Q_BUZZ.3@156.527,111.563
NetC_ADC_2: C_ADC.2 R46.1 U21.5 | length 5.2
  Bottom Layer w0.5: C_ADC.2@142.748,129.098 144.97,129.098 146.238,130.366 U21.5@147.447,130.366
NetD1_2: D1.2 R1.1
  other v1: 103.18,99.12
NetD3_2: D3.2 R3.2
  other v1: 129.48,99.12
NetD21_2: D21.2 R21.2
  other v1: 122.81,99.17
NetD24_2: D24.2 R24.2
  other v1: 116.35,99.15
NetD_D_1_2: D_D_1.2 R114.1 | length 13.6
  Top Layer w0.4: D_D_1.2@163.294,99.06 163.294,99.914 172.24,108.86 R114.1@172.24,109
NetD_D_2_2: D_D_2.2 R134.1 | length 11.5
  Top Layer w0.4: D_D_2.2@169.898,99.06 169.898,100.708 173.73,104.54 R134.1@173.73,109.02
NetD_D_3_2: D_D_3.2 R154.1 | length 10.6
  Top Layer w0.4: R154.1@175.25,109.14 175.25,100.312 D_D_3.2@176.502,99.06
NetD_D_4_2: D_D_4.2 R174.1 | length 17.3
  Top Layer w0.3: R174.1@176.77,109.14 176.77,102.79 177.97,101.59 177.97,97.95 178.16,97.76 182.22,97.76 D_D_4.2@183.12,98.66
NetD_Done_2: D_Done.2 R_done_led.1 | length 2.4
  Top Layer w0.7: R_done_led.1@165.758,130.778 D_Done.2@168.144,130.778
NetD_REV_2: D_REV.2 R_D_REV.2
  other v1: 109.36,99.2
Nete1_2: e1.2 U4.2 | length 42.2
  Bottom Layer w0.3: U4.2@181.158,147.055 182.445,147.055 182.79,147.4 182.79,158.13 187.71,163.05 196.34,163.05 201.6,168.31 206.47,168.31 206.756,168.024 e1.2@206.756,166.624
Nete1_3: e1.3 U4.3 | length 37.9
  Bottom Layer w0.3: U4.3@181.158,146.405 183.075,146.405 183.5,146.83 183.5,157.84 188.07,162.41 198.88,162.41 200.09,163.62 201.212,163.62 e1.3@204.216,166.624
Nete2_2: e2.2 U1.7 | length 26.8
  Bottom Layer w0.3: e2.2@70.612,166.624 70.612,164.248 71.137,163.723 86.077,163.723 91.345,158.455 U1.7@92.654,158.455
Nete2_3: e2.3 U1.8 | length 23.4
  Bottom Layer w0.3: e2.3@73.152,166.624 73.152,165.271 74.093,164.33 86.32,164.33 91.57,159.08 U1.8@92.654,159.08
Nete3_2: e3.2 U1.5 | length 27.4
  Bottom Layer w0.3: e3.2@70.612,160.012 70.612,158.918 71.35,158.18 76.3,158.18 80.53,162.41 85.688,162.41 90.948,157.15 U1.5@92.68,157.15
Nete3_3: e3.3 U1.6 | length 23.5
  Bottom Layer w0.3: e3.3@73.152,160.012 73.152,160.852 75.42,163.12 85.83,163.12 91.14,157.81 U1.6@92.624,157.81
Nete4_2: e4.2 U4.5 | length 40.5
  Bottom Layer w0.3: U4.5@181.158,145.105 183.225,145.105 184.22,146.1 184.22,157.49 188.46,161.73 199.82,161.73 200.55,162.46 204.308,162.46 e4.2@206.756,160.012
Nete4_3: e4.3 U4.6 | length 37.6
  Bottom Layer w0.3: U4.6@181.158,144.455 183.945,144.455 184.93,145.44 184.93,156.88 189.06,161.01 200.37,161.01 201.11,161.75 202.478,161.75 e4.3@204.216,160.012
NetP2_3: P2.3 U22.7 | length 17.8
  Top Layer w0.4: U22.7@143.63,177.16 143.63,178.91 153.1,188.38 P2.3@153.1,191
NetP2_4: P2.4 R44.1 | length 4
  Bottom Layer w1: R44.1@153.45,188.4 154.34,188.4 155.55,189.61 155.55,191.008 P2.4@155.55,191.03
NetQ1_4: Q1.4 R47.2 R129.2 | length 4.6
  Bottom Layer w0.5: R129.2@111.76,175.094 112.254,175.094 112.74,175.58 ; Q1.4@112.74,177.53 112.74,175.58 ; R47.2@114.04,175.138 113.792,175.138 113.182,175.138 112.74,175.58
NetQ2_4: Q2.4 R48.2 | length 2
  Top Layer w0.5: v1@116.33,175.64 116.335,175.645 116.54,175.85 Q2.4@116.54,177.53
  other v1: 116.34,175.64
NetQ3_4: Q3.4 R49.2 R130.2 | length 3.5
  Bottom Layer w0.5: Q3.4@118.32,177.53 118.32,175.58 118.762,175.138 R49.2@119.718,175.138
NetQ4_4: Q4.4 R50.2 | length 2
  Top Layer w0.5: v1@121.93,175.63 v1(121.94,175.64) 122.13,175.83 Q4.4@122.131,177.531
NetQ5_4: Q5.4 R51.2 R135.2 | length 3.5
  Bottom Layer w0.5: Q5.4@123.91,177.53 123.91,175.58 124.352,175.138 R51.2@125.326,175.138
NetQ6_4: Q6.4 R52.2 | length 2
  Top Layer w0.5: v1@127.5,175.64 127.505,175.645 127.72,175.86 Q6.4@127.719,177.531
  other v1: 127.51,175.64
NetQ7_4: Q7.4 R59.2 R136.2 | length 3.4
  Bottom Layer w0.5: Q7.4@82.15,185.87 84.1,185.87 84.542,186.312 84.542,186.944 R59.2@84.542,187.17
NetQ8_4: Q8.4 R60.2 R137.2 | length 3.4
  Bottom Layer w0.5: R60.2@191.848,175.28 191.848,176.138 192.29,176.58 Q8.4@194.24,176.58
NetQ9_4: Q9.4 R61.2 | length 1.9
  Top Layer w0.5: Q9.4@82.15,189.68 83.83,189.68 84.005,189.505 v1@84.01,189.5
  other v1: 84.01,189.51
NetQ10_4: Q10.4 R62.2 | length 1.9
  Top Layer w0.5: v1@192.34,172.77 192.32,172.77 194.246,172.77 Q10.4@194.25,172.77
  other v1: 192.34,172.74
NetQ11_4: Q11.4 R65.2 R138.2 | length 3.4
  Bottom Layer w0.5: Q11.4@82.15,180.31 84.1,180.31 84.542,180.752 84.542,181.356 R65.2@84.542,181.61
NetQ12_4: Q12.4 R66.2 R139.2 | length 3.4
  Bottom Layer w0.5: R66.2@191.858,180.86 191.858,181.718 192.3,182.16 Q12.4@194.246,182.161 Q12.4@194.25,182.16
NetQ13_4: Q13.4 R67.2 | length 2
  Top Layer w0.5: Q13.4@82.15,184.13 83.79,184.13 v1@84.01,183.91
  other v1: 84.01,183.9
NetQ14_4: Q14.4 R68.2 | length 1.9
  Top Layer w0.5: v1@192.31,178.34 192.34,178.34 Q14.4@194.24,178.34
  other v1: 192.34,178.35
NetQ15_4: Q15.4 R71.2 R140.2 | length 3.3
  Bottom Layer w0.5: Q15.4@82.15,174.68 84.1,174.68 84.494,175.074 R71.2@84.494,175.908
NetQ16_4: Q16.4 R72.2 R141.2 | length 3.5
  Bottom Layer w0.5: R72.2@191.858,186.436 191.858,187.318 192.3,187.76 Q16.4@194.246,187.76
NetQ17_4: Q17.4 R73.2 | length 1.9
  Top Layer w0.5: Q17.4@82.15,178.49 83.84,178.49 v1(84.01,178.32)
NetQ18_4: Q18.4 R74.2 | length 1.9
  Top Layer w0.5: v1@192.32,183.95 v1@192.34,183.95 ; v1@192.36,183.95 Q18.4@194.25,183.95
  other v1: 192.34,183.93
NetQ19_4: Q19.4 R77.2 R142.2 | length 3.4
  Bottom Layer w0.5: Q19.4@82.15,147.22 84.1,147.22 84.542,147.662 84.542,148.336 R77.2@84.542,148.52
NetQ20_4: Q20.4 R78.2 R143.2 | length 3.4
  Bottom Layer w0.5: R78.2@191.858,137.16 191.858,138.018 192.3,138.46 Q20.4@194.25,138.46
NetQ21_4: Q21.4 R79.2 | length 1.9
  Top Layer w0.5: Q21.4@82.15,151.021 83.83,151.02 83.985,150.865 v1@84,150.85
  other v1: 84,150.88
NetQ22_4: Q22.4 R80.2 | length 2
  Top Layer w0.5: v1@192.36,134.65 192.32,134.65 194.246,134.65 Q22.4@194.25,134.65
  other v1: 192.36,134.61
NetQ23_4: Q23.4 R83.2 R144.2 | length 3.4
  Bottom Layer w0.5: Q23.4@82.15,141.66 84.1,141.66 84.542,142.102 84.542,142.748 R83.2@84.542,142.96
NetQ24_4: Q24.4 R84.2 R145.2 | length 3.4
  Bottom Layer w0.5: R84.2@191.858,142.74 191.858,142.748 191.858,143.598 192.3,144.04 Q24.4@194.25,144.04
NetQ25_4: Q25.4 R85.2 | length 1.9
  Top Layer w0.5: Q25.4@82.15,145.46 83.79,145.46 v1@83.99,145.26
  other v1: 84,145.27
NetQ26_4: Q26.4 R86.2 | length 1.9
  Top Layer w0.5: v1(192.36,140.22) 192.35,140.22 194.246,140.22 Q26.4@194.25,140.22
NetQ27_4: Q27.4 R89.2 R146.2 | length 3.2
  Bottom Layer w0.5: Q27.4@82.15,136.15 84.1,136.15 84.542,136.592 84.542,137.16 R89.2@84.542,137.25
NetQ28_4: Q28.4 R90.2 R147.2 | length 3.4
  Bottom Layer w0.5: R90.2@191.858,148.33 191.858,148.336 191.858,149.188 192.26,149.59 Q28.4@194.21,149.59
NetQ29_4: Q29.4 R91.2 | length 2
  Top Layer w0.5: Q29.4@82.15,139.96 83.72,139.96 83.995,139.685 v1@84,139.68
  other v1: 84,139.69
NetQ30_4: Q30.4 R92.2 | length 1.9
  Top Layer w0.5: v1@192.36,145.79 194.246,145.79 Q30.4@194.25,145.79
  other v1: 192.36,145.8
NetQ_BUZZ_1: Q_BUZZ.1 R_Buzz.2 | length 2.2
  Top Layer w0.4: R_Buzz.2@158.627,108.449 Q_BUZZ.1@158.627,110.613